# EAGLE board I2V_Rev4 (EAGLE 7.5.0)
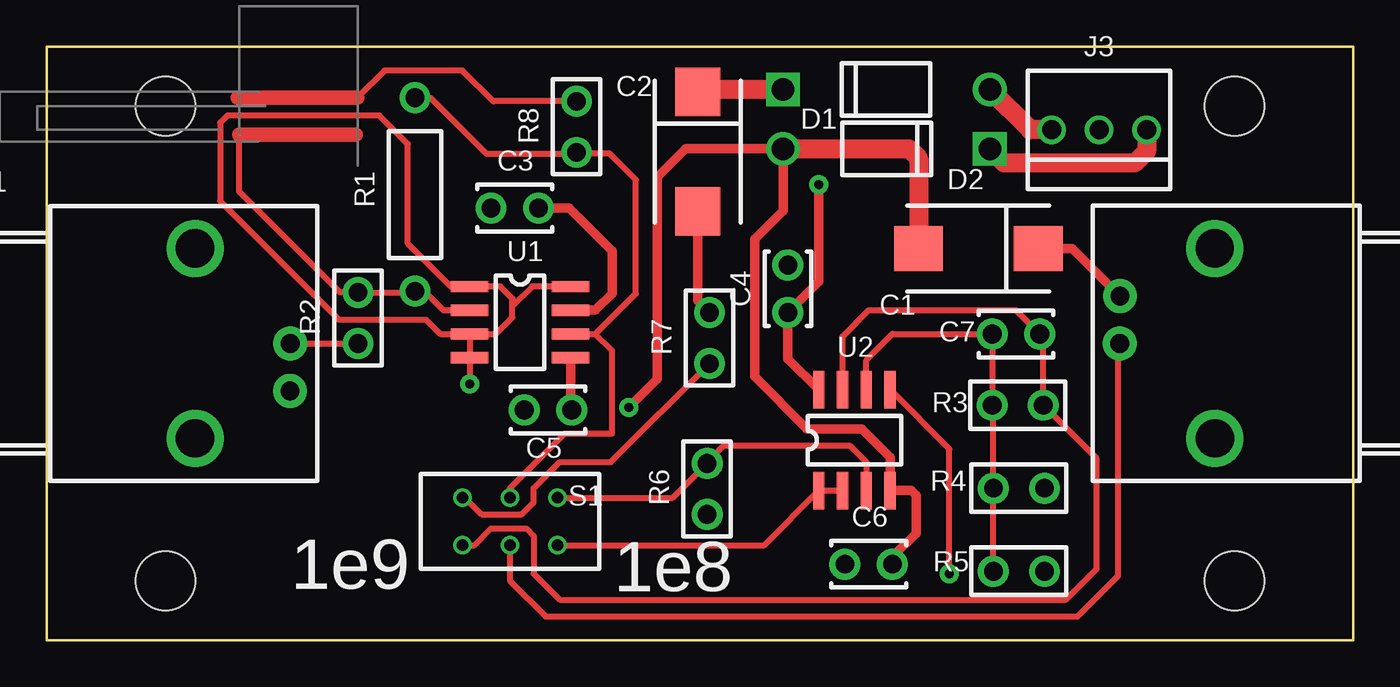
[diagram p0: board, top side]
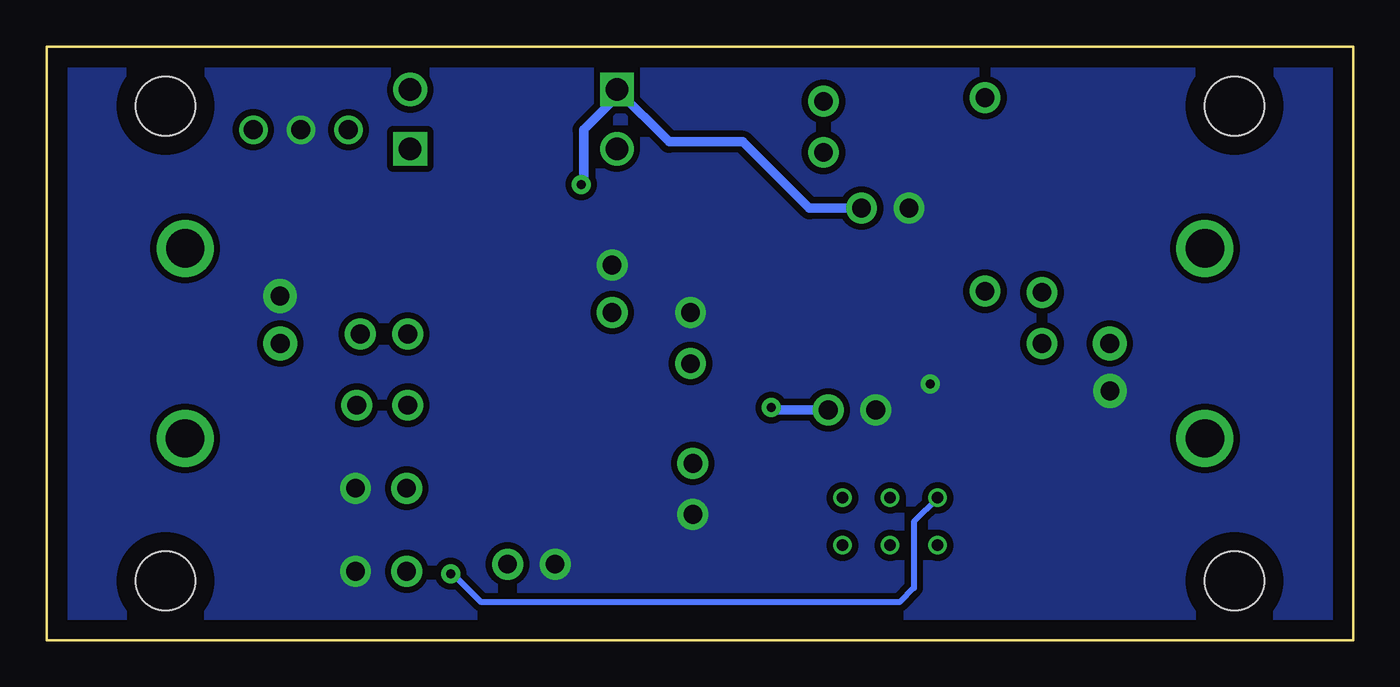
[diagram p1: board, bottom side, seen from below]

Size 69.85 x 31.75 mm. Coordinates in mm from the lower left corner, seen from the top.
Outline: 0,0 69.85,0 69.85,31.75 0,31.75 0,0
Copper layers (1*16): Top 0.035mm / dielectric 1.5mm / $GND 0.035mm
Design rules "default *": minimum track width 10mil, minimum drill 0.61mm, track to track 8mil, track to pad 8mil, pad to pad 8mil, via to via 8mil, smd to smd 8mil, copper to edge 40mil, drill to drill 8mil, minimum pad ring 0mil, minimum via ring 8mil, stop-mask expansion 4mil, vias tented up to drill 19mil, thermal gap 10mil
Net classes: 0 Default: width 0.33 mm, clearance 0.33 mm, clearance 0.33 mm to class 1; 1 bigger: width 0.508 mm, clearance 0.33 mm, clearance 0.33 mm to class 0
Holes 3.17 mm at 63.5,3.17 6.35,3.17 63.5,28.57 6.35,28.57

## Footprints (pad centres in the part's own frame; a part is rotated, then mirrored left to right if it is on the bottom)
TC_2917 = smd 2.6 x 2.4: 1 -3.2,0; 2 3.2,0
TC_2917_C2 = smd 2.6 x 2.4: 1 -3.2,0; 2 3.2,0
CAP-2.54/4x2.5 = drill 1 pad 1.65: 1 -1.27,0; 2 1.27,0
CAP-2.54/4x2.5_C4 = drill 1 pad 1.65: 1 -1.27,0; 2 1.27,0
DO-41 = drill 1.2 pad 1.8 square: 1 -5.525,0 | drill 1.2 pad 1.8: 2 5.525,0
031-5637 = drill 1 pad 1.8: 1 0,-2.854; 2 -2.54,-2.851 | drill 2.05 pad 3.05: A -5.08,2.226; B 5.08,2.229
power_connector = drill 1.016 pad 1.524: 1 0,-2.54; 2 0,0; 3 0,2.54
RES-10.35/6.8x2.8 = drill 1 pad 1.65: 1 -5.175,0; 2 5.175,0
RES-10.35/6.8x2.8_standup = drill 1 pad 1.65: 1 -1.365,0; 2 1.365,0
RES-10.35/6.8x2.8_standup_R3 = drill 1 pad 1.65: 1 -1.365,0; 2 1.365,0
switch_AS2D-2M = drill 0.6 pad 1: 1 -2.54,-1.27; 2 0,-1.27; 3 2.54,-1.27; 4 -2.54,1.27; 5 0,1.27; 6 2.54,1.27
SOIC-8/150mil = smd 2 x 0.6: 1 -2.7,1.905; 2 -2.7,0.635; 3 -2.7,-0.635; 4 -2.7,-1.905; 5 2.7,-1.905; 6 2.7,-0.635; 7 2.7,0.635; 8 2.7,1.905
SOIC-8/150mil_U2 = smd 2 x 0.6: 1 -2.7,1.905; 2 -2.7,0.635; 3 -2.7,-0.635; 4 -2.7,-1.905; 5 2.7,-1.905; 6 2.7,-0.635; 7 2.7,0.635; 8 2.7,1.905

## Placement (x,y rotation side)
C1  47uF Tant  [TC_2917]  49.81,20.95 180 top
C2  47uF Tant  [TC_2917_C2]  34.8,26.14 270 top
C3  .1uf  [CAP-2.54/4x2.5]  25.02,23.11 0 top
C4  .1uf  [CAP-2.54/4x2.5_C4]  39.62,18.8 270 top
C5  .1uf  [CAP-2.54/4x2.5]  26.8,12.32 0 top
C6  .1uf  [CAP-2.54/4x2.5]  43.94,4.06 0 top
C7  100pf  [CAP-2.54/4x2.5]  51.82,16.38 0 top
D1  1N5818  [DO-41]  44.9,29.46 0 top
D2  1N5818  [DO-41]  44.89,26.29 180 top
J1  5227161-9  [031-5637]  10.16,15.88 90 top
J2  5227161-9  [031-5637]  60.22,15.88 270 top
J3  DEV_J3  [power_connector]  56.26,27.3 270 top
R1  100M 1% 1/4W  [RES-10.35/6.8x2.8]  19.68,23.84 90 top
R2  10K 1% MF  [RES-10.35/6.8x2.8_standup]  16.64,17.24 90 top
R3  9.09K 1% MF  [RES-10.35/6.8x2.8_standup_R3]  51.91,12.57 0 top
R4  10K 1% MF  [RES-10.35/6.8x2.8_standup_R3]  51.98,8.13 180 top
R5  1K 1% MF  [RES-10.35/6.8x2.8_standup_R3]  51.98,3.68 180 top
R6  10K 1% MF  [RES-10.35/6.8x2.8_standup]  35.31,8.1 90 top
R7  10K 1% MF  [RES-10.35/6.8x2.8_standup]  35.43,16.16 270 top
R8  0  [RES-10.35/6.8x2.8_standup]  28.32,27.46 270 top
S1  AS2D-2M-10-Z  [switch_AS2D-2M]  24.77,6.35 180 top
U1  OPA129U  [SOIC-8/150mil]  25.31,17.02 0 top
U2  LT1464CS8  [SOIC-8/150mil_U2]  43.18,10.7 90 top

## Library data of the parts
C1 C2 = common; ATTR_1: Electrolytic; DESCRIPTION: TANT 25V 20% 2917; MANUFACTURER: Kemet
C3-C6 = common; DESCRIPTION: X7R 10% 50V
C7 = common; DESCRIPTION: 10% 50V C0G
D1 D2 = common; ATTR_1: Schottky; DESCRIPTION: Diode
J1 J2 = common; DATASHEET: http://datasheets.diptrace.com/con_rf_coax/C031-5637.pdf; MANUFACTURER: Amphenol
J3 = common
R1 = common; DESCRIPTION: 100M 1% MOX200001006FE
R2-R7 = common; DESCRIPTION: 1% .25W MF 100ppm/C
R8 = common; DESCRIPTION: Fixed Resistor
S1 = common; ATTR_1: DPDT; ATTR_2: Normally Closed; DESCRIPTION: Switch
U1 = common; MANUFACTURER: Burr-Brown
U2 = common; DATASHEET: http://datasheets.diptrace.com/linear/LT1464_1465.pdf; MANUFACTURER: Linear

## Nets
+15V [bigger]: C2.1 C3.2 C4.2 D1.1 U1.7 U2.8
-15V [bigger]: C1.2 C5.2 C6.2 D2.2 U1.5 U2.4
GND: C1.1 C2.2 C3.1 C4.1 C5.1 C6.1 J1.2 J2.2 J3.2 R4.1 R5.1 R6.1 R7.1 U1.1 U1.3 U1.4 U1.8
Net_0: R8.1
Net_5: R1.2 R8.2 S1.2 U1.6
Net_6: R1.1 R2.2 U1.2
Net_7: J1.1 R2.1
Net_8: R6.2 S1.1 U2.3
Net_9: S1.4 U2.1 U2.2
Net_10: C7.1 R3.1 R4.2 R5.2 U2.6
Net_11: C7.2 R3.2 S1.6 U2.7
Net_13: J2.1 S1.5
Net_14: R7.2 S1.3 U2.5
supply_+15V [bigger]: D1.2 J3.1
supply_-15V [bigger]: D2.1 J3.3

## Tracks (layer width: path | path; a pad name or v marks a point on that pad's centre or on a via)
+15V  (via drill 0.48 pad 1.02)
  Top 0.508: U2.8 39.62,15.05 C4.2 41.27,19.18 v41.27,24.38 | C3.2 27.94,23.11 30.23,20.83 30.23,18.54 29.34,17.65 U1.7
  Top 1.016: D1.1 34.92,29.46 C2.1
  $GND 0.508: C3.2 29.08,23.11 32.64,26.67 36.58,26.67 D1.1 39.37,29.08 41.15,27.3 41.15,24.38 v41.27,24.38
-15V  (via drill 0.48 pad 1.02)
  Top 0.508: C6.2 45.21,4.45 46.48,5.71 46.48,7.75 46.23,8 U2.4 45.09,9.78 43.56,11.3 40.64,11.3 37.85,14.1 37.85,21.46 39.37,22.99 D2.2 34.16,26.29 32.64,24.77 32.64,13.97 v31.11,12.45 | U1.5 28.01,12.38 C5.2
  Top 1.016: D2.2 46.1,26.29 46.61,25.78 C1.2
  $GND 0.508: C5.2 30.99,12.32 v31.11,12.45
GND  (via drill 0.48 pad 1.02)
  Top 0.33: U1.3 U1.4 | U1.3 24,16.38 24.89,17.27 24.89,17.87 | 24.89,17.87 24.89,18.29 24.26,18.92 U1.1 21.59,18.92 19.3,21.21 19.3,26.54 17.78,28.07 9.65,28.07 9.27,27.69 9.27,23.5 15.62,17.14 20.27,17.14 21.04,16.38 U1.3 | U1.4 22.73,15.11 | U1.4 v22.61,13.72 | U1.8 25.94,18.92 24.89,17.87
  Top 0.508: C1.1 54.83,20.95 J2.2 | C2.2 34.8,18.16 R7.1
  pour $GND (isolate 0.33, no thermals): 0.98,0.98 68.87,0.98 68.87,30.77 0.98,30.77
Net_0
  Top 0.33: R8.1 23.88,28.83 22.23,30.48 18.06,30.48 16.6,29.02 | 10.22,29.02 10.16,29.08 10.29,29.08
  Top 0.762: 16.6,29.02 10.22,29.02
Net_5
  Top 0.33: 19.75,28.96 R1.2 20.51,29.02 23.5,26.04 28.26,26.04 R8.2 28.39,26.04 30.1,26.04 31.5,24.64 31.5,18.54 29.34,16.38 | U1.6 29.34,16.38 | S1.2 24.77,8.13 27.69,11.05 30.23,11.05 30.23,15.49 29.34,16.38
Net_6
  Top 0.33: U1.2 21.21,17.65 20.19,18.67 R1.1 19.62,18.61 R2.2 15.69,18.61 10.29,24 10.29,27.05
  Top 0.762: 10.29,27.05 16.51,27.05
Net_7
  Top 0.33: J1.1 R2.1
Net_8
  Top 0.33: S1.1 33.47,7.62 R6.2 35.31,9.53 36.2,10.41 42.93,10.41 43.81,9.53 U2.3
Net_9
  Top 0.33: U2.2 U2.1 38.35,5.08 S1.4 | U2.2
Net_10
  Top 0.33: R5.2 R4.2 | R4.2 50.61,8.32 | R4.2 50.61,12.51 R3.1 C7.1 45.21,16.38 43.81,14.99 U2.6
Net_11
  Top 0.33: U2.7 42.55,16.26 43.94,17.65 51.82,17.65 C7.2 53.28,16.19 R3.2 56.13,9.71 56.13,3.81 54.48,2.16 27.43,2.16 26.04,3.56 26.04,5.59 25.65,5.97 23.75,5.97 22.86,5.08 S1.6
Net_13
  Top 0.33: S1.5 24.77,3.17 26.67,1.27 55.12,1.27 57.28,3.43 57.28,15.78 J2.1
Net_14  (via drill 0.48 pad 1.02)
  Top 0.33: S1.3 22.35,7.62 23.24,6.73 25.4,6.73 26.04,7.37 26.04,8.13 27.43,9.53 30.16,9.53 R7.2 | v48.26,3.56 48.26,10.23 U2.5
  $GND 0.33: S1.3 23.5,6.35 23.5,2.79 24.26,2.03 46.61,2.03 48.13,3.56 v48.26,3.56
supply_+15V
  Top 1.016: J3.1 52.58,27.3 D1.2
supply_-15V
  Top 1.016: J3.3 58.8,26.16 58.17,25.53 51.18,25.53 D2.1

## Text on the board
tPlace: 1e9 | 1e8